# Altium PCB PCB1.PcbDoc
Units mm, origin at the board's own origin, x right, y up, seen from the top; angles counter-clockwise.
Board outline 200 x 56 mm, 2 copper layers (Top Layer, Bottom Layer); 54 components, 45 nets, 164 pads, 1 vias.
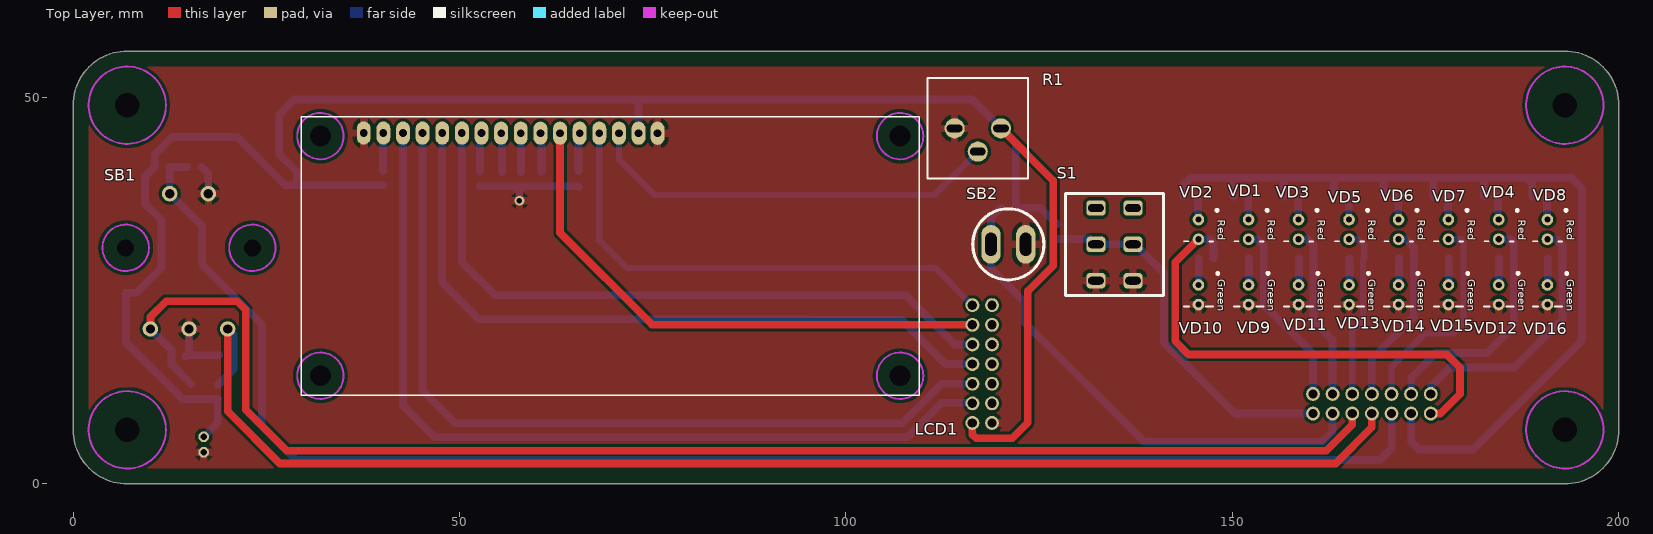
[diagram p0: Top Layer view]
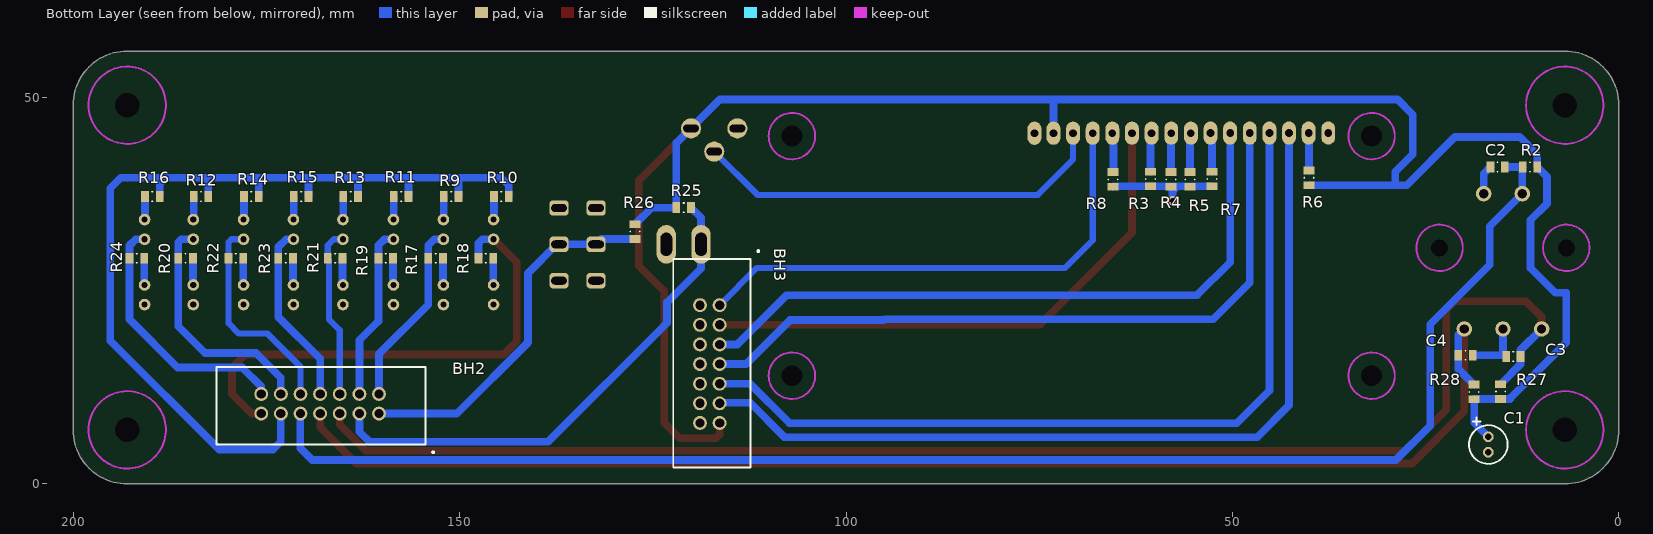
[diagram p1: Bottom Layer view, seen from below]
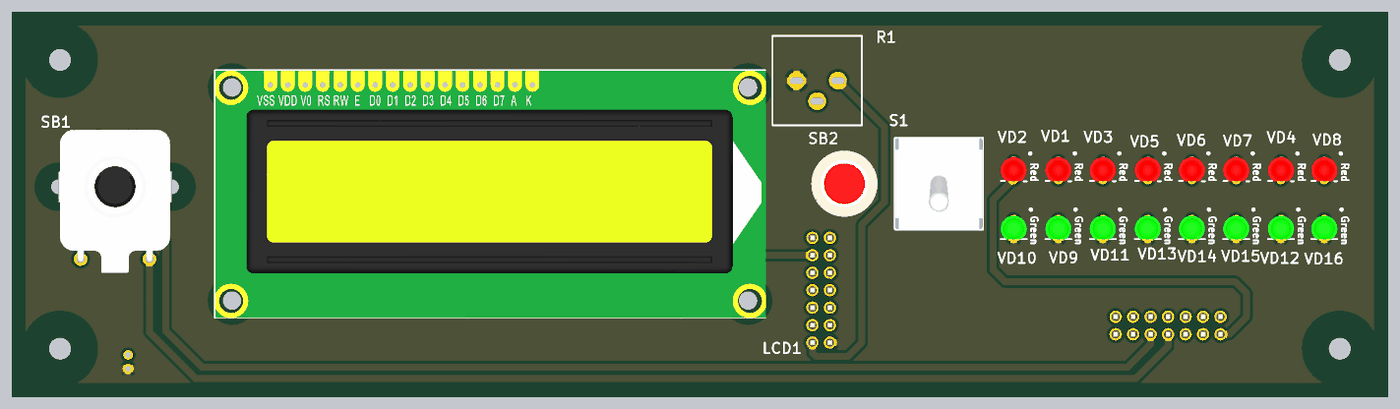
[diagram p2: 3D render of the assembled board from above, using the file's embedded part models]
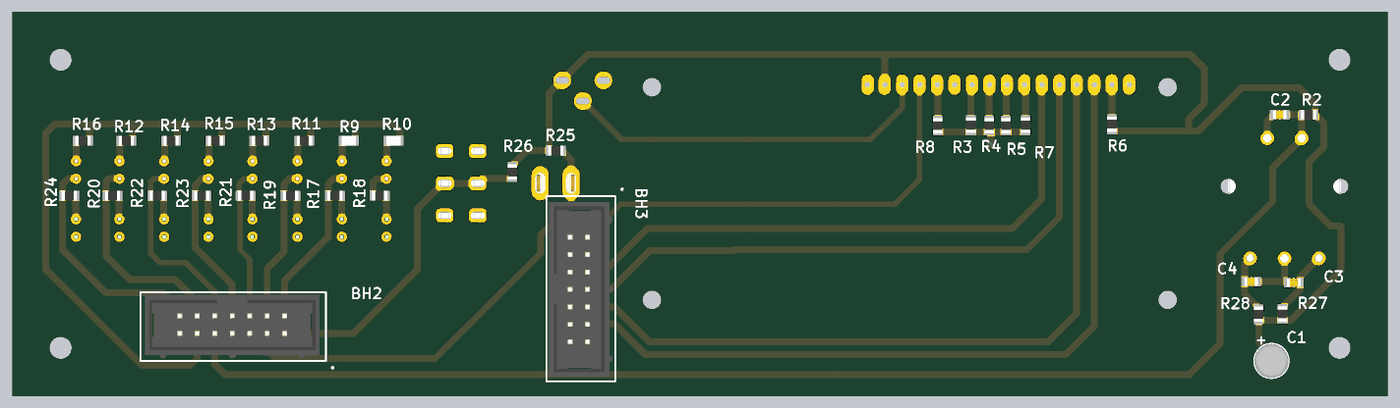
[diagram p3: 3D render of the assembled board from below, using the file's embedded part models]

## Layer stack, top to bottom
Top Solder: solder mask 0.0102, Solder Resist, Dk 3.5
Top Layer: signal copper 0.0356
Dielectric 1: dielectric 0.32, FR-4, Dk 4.8
Bottom Layer: signal copper 0.0356
Bottom Solder: solder mask 0.0102, Solder Resist, Dk 3.5

## Board outline
0,7 0,49 cw(c7,49) 7,56 193,56 cw(c193,49) 200,49 200,7 cw(c193,7) 193,0 7,0 cw(c7,7)

## Design rules (kind name [scope] priority, off if disabled: settings)
BoardOutlineClearance [All] p1: gap=2 ignorepadtopadclearanceinfootprint=FALSE
Clearance Clearance_1 [All] p1: gap=0.4 ignorepadtopadclearanceinfootprint=FALSE
Clearance [All vs InPolygon] p2: gap=0.5 ignorepadtopadclearanceinfootprint=FALSE
Height [All] p1: minheight=0 maxheight=100 prefheight=12.7
PlaneConnect [All] p1: planeconnectstyle=Relief reliefexpansion=0.508 reliefentries=4 reliefconductorwidth=1 reliefairgap=0.5
PolygonConnect [All] p1: connectstyle=Relief reliefconductorwidth=1 reliefentries=4 polygonreliefangle="90 Angle" airgapwidth=0.5
RoomDefinition U_СВЕТОДИОДЫ8 [InComponentClass('U_СВЕТОДИОДЫ8')] p1: confinementstyle=ConfineIn formatcopy=TRUE lockcomponents=FALSE outline 187.771,35.971 187.771,38.429 191.729,38.429 191.729,35.972 194.758,35.972 194.758,21.317 188.482,21.317 188.482,35.971
RoomDefinition U_СВЕТОДИОДЫ7 [InComponentClass('U_СВЕТОДИОДЫ7')] p2: confinementstyle=ConfineIn formatcopy=TRUE lockcomponents=FALSE outline 181.471,35.971 181.471,38.429 185.429,38.429 185.429,35.972 188.458,35.972 188.458,21.317 182.182,21.317 182.182,35.971
RoomDefinition U_СВЕТОДИОДЫ5 [InComponentClass('U_СВЕТОДИОДЫ5')] p3: confinementstyle=ConfineIn formatcopy=TRUE lockcomponents=FALSE outline 168.513,35.971 168.513,38.429 172.471,38.429 172.471,35.972 175.5,35.972 175.5,21.317 169.224,21.317 169.224,35.971
RoomDefinition U_СВЕТОДИОДЫ4 [InComponentClass('U_СВЕТОДИОДЫ4')] p4: confinementstyle=ConfineIn formatcopy=TRUE lockcomponents=FALSE outline 162.113,35.971 162.113,38.429 166.071,38.429 166.071,35.972 169.1,35.972 169.1,21.317 162.824,21.317 162.824,35.971
RoomDefinition U_СВЕТОДИОДЫ3 [InComponentClass('U_СВЕТОДИОДЫ3')] p5: confinementstyle=ConfineIn formatcopy=TRUE lockcomponents=FALSE outline 155.571,35.971 155.571,38.429 159.529,38.429 159.529,35.972 162.558,35.972 162.558,21.317 156.282,21.317 156.282,35.971
RoomDefinition U_СВЕТОДИОДЫ2 [InComponentClass('U_СВЕТОДИОДЫ2')] p6: confinementstyle=ConfineIn formatcopy=TRUE lockcomponents=FALSE outline 149.113,35.971 149.113,38.429 153.071,38.429 153.071,35.972 156.1,35.972 156.1,21.317 149.824,21.317 149.824,35.971
RoomDefinition U_СВЕТОДИОДЫ1 [InComponentClass('U_СВЕТОДИОДЫ1')] p7: confinementstyle=ConfineIn formatcopy=TRUE lockcomponents=FALSE outline 142.621,35.971 142.621,38.429 146.579,38.429 146.579,35.972 149.608,35.972 149.608,21.317 143.332,21.317 143.332,35.971
RoomDefinition U_СВЕТОДИОДЫ6 [InComponentClass('U_СВЕТОДИОДЫ6')] p8: confinementstyle=ConfineIn formatcopy=TRUE lockcomponents=FALSE outline 174.963,35.971 174.963,38.429 178.921,38.429 178.921,35.972 181.95,35.972 181.95,21.317 175.674,21.317 175.674,35.971
RoutingVias [All] p1: holewidth=0.711 width=1.27 viastyle="Through Hole" minholewidth=0.711 minwidth=1.27 maxholewidth=0.711 maxwidth=1.27
SolderMaskExpansion [All] p1: expansion=0.102
Width Width_2 [InNet('+3.3')] p1: maxlimit=1 minlimit=0.8 preferedwidth=1
Width Width_1 [InNet('GND')] p2: maxlimit=1 minlimit=0.8 preferedwidth=1
Width [All] p3: maxlimit=1 minlimit=0.1 preferedwidth=1
28 further rules are at their usual default settings.

## Classes and differential pairs
channel class СВЕТОДИОДЫ: U_СВЕТОДИОДЫ1 U_СВЕТОДИОДЫ2 U_СВЕТОДИОДЫ3 U_СВЕТОДИОДЫ4 U_СВЕТОДИОДЫ5 U_СВЕТОДИОДЫ6 U_СВЕТОДИОДЫ7 U_СВЕТОДИОДЫ8
component class управление+отладка: BH2 BH3 C1 C2 C3 C4 LCD1 R1 R2 R3 R4 R5 R6 R7 R8 R25 R26 R27 R28 S1 SB1 SB2
component class U_СВЕТОДИОДЫ1: R10 R18 R?7 VD2 VD10
component class U_СВЕТОДИОДЫ2: R9 R17 R?7 VD1 VD9
component class U_СВЕТОДИОДЫ3: R11 R19 R?7 VD3 VD11
component class U_СВЕТОДИОДЫ4: R13 R21 R?7 VD5 VD13
component class U_СВЕТОДИОДЫ5: R15 R23 R?7 VD6 VD14
component class U_СВЕТОДИОДЫ6: R14 R22 R?7 VD7 VD15
component class U_СВЕТОДИОДЫ7: R12 R20 R?7 VD4 VD12
component class U_СВЕТОДИОДЫ8: R1_U_СВЕТОДИОДЫ8 R2_U_СВЕТОДИОДЫ8 R16 R24 R?7 VD1_U_СВЕТОДИОДЫ8 VD2_U_СВЕТОДИОДЫ8 VD8 VD16

## Components (designator, comment, footprint, x,y, rotation, side; value= is the part's Value field where it differs from the comment)
BH2 "BH14(2)" "BH-14 (DS1013-14S) (IDC-14MS)" 160.42,9.1 r0 bottom
BH3 "BH14(3)" "BH-14 (DS1013-14S) (IDC-14MS)" 116.35,23.127 r270 bottom
C1 "C(AlEL)" C(AlEL) 16.9,4.1 r90 bottom
C2 "C(ceramic)" C(ceramic) 15.7,41 r180 bottom
C3 "C(ceramic)" C(ceramic) 13.65,16.5 r180 bottom
C4 "C(ceramic)" C(ceramic) 19.85,16.65 r0 bottom
LCD1 "BCB1602" BCB1602 32,14 r0 top
R1 "Comment" R(подстр) 117.05,46 r180 top (schematic designator R3)
R2 "R" R 11.5,41 r180 bottom (schematic designator R11)
R3 "R" R 60.6,39.45 r270 bottom (schematic designator R5)
R4 "R" R 57.95,39.4 r270 bottom (schematic designator R6)
R5 "R" R 55.5,39.4 r270 bottom (schematic designator R7)
R6 "R" R 40.1,39.6 r270 bottom (schematic designator R9)
R7 "R" R 52.65,39.45 r270 bottom (schematic designator R8)
R8 "R" R 65.45,39.4 r270 bottom (schematic designator R4)
R9 "R" R 151.092,37.2 r180 bottom (schematic designator R1)
R10 "R" R 144.6,37.2 r180 bottom (schematic designator R1)
R11 "R" R 157.55,37.2 r180 bottom (schematic designator R1)
R12 "R" R 183.45,37.2 r180 bottom (schematic designator R1)
R13 "R" R 164.092,37.2 r180 bottom (schematic designator R1)
R14 "R" R 176.942,37.2 r180 bottom (schematic designator R1)
R15 "R" R 170.492,37.2 r180 bottom (schematic designator R1)
R16 "R" R 189.75,37.2 r180 bottom (schematic designator R1)
R17 "R" R 153.092,29.2 r0 bottom (schematic designator R2)
R18 "R" R 146.6,29.2 r0 bottom (schematic designator R2)
R19 "R" R 159.55,29.2 r0 bottom (schematic designator R2)
R20 "R" R 185.45,29.2 r0 bottom (schematic designator R2)
R21 "R" R 166.092,29.2 r0 bottom (schematic designator R2)
R22 "R" R 178.942,29.2 r0 bottom (schematic designator R2)
R23 "R" R 172.492,29.2 r0 bottom (schematic designator R2)
R24 "R" R 191.75,29.2 r0 bottom (schematic designator R2)
R25 "R" R 121,35.75 r180 bottom (schematic designator R12)
R26 "R" R 127.3,32.65 r270 bottom (schematic designator R10)
R27 "R" R 15.3,11.95 r270 bottom (schematic designator R13)
R28 "R" R 18.75,11.9 r270 bottom (schematic designator R14)
S1 "(?)тумблер" MTS-2 134.735,31 r180 top
SB1 "PEC16-4220F-S0024" PEC16-4220F-S0024 15,30.55 r0 top (schematic designator SB2)
SB2 "ПУСК" кнопка 121,31 r270 top (schematic designator SB1)
VD1 "L-934(RED)" L-934(RED) 152.092,34.2 r270 top
VD2 "L-934(RED)" L-934(RED) 145.6,34.2 r270 top (schematic designator VD1)
VD3 "L-934(RED)" L-934(RED) 158.55,34.2 r270 top (schematic designator VD1)
VD4 "L-934(RED)" L-934(RED) 184.45,34.2 r270 top (schematic designator VD1)
VD5 "L-934(RED)" L-934(RED) 165.092,34.2 r270 top (schematic designator VD1)
VD6 "L-934(RED)" L-934(RED) 171.492,34.2 r270 top (schematic designator VD1)
VD7 "L-934(RED)" L-934(RED) 177.942,34.2 r270 top (schematic designator VD1)
VD8 "L-934(RED)" L-934(RED) 190.75,34.2 r270 top (schematic designator VD1)
VD9 "L-934(GREEN)" L-934(GREEN) 152.092,25.74 r270 top (schematic designator VD2)
VD10 "L-934(GREEN)" L-934(GREEN) 145.6,25.74 r270 top (schematic designator VD2)
VD11 "L-934(GREEN)" L-934(GREEN) 158.55,25.74 r270 top (schematic designator VD2)
VD12 "L-934(GREEN)" L-934(GREEN) 184.45,25.74 r270 top (schematic designator VD2)
VD13 "L-934(GREEN)" L-934(GREEN) 165.092,25.74 r270 top (schematic designator VD2)
VD14 "L-934(GREEN)" L-934(GREEN) 171.492,25.74 r270 top (schematic designator VD2)
VD15 "L-934(GREEN)" L-934(GREEN) 177.942,25.74 r270 top (schematic designator VD2)
VD16 "L-934(GREEN)" L-934(GREEN) 190.75,25.74 r270 top (schematic designator VD2)

## Footprints (in the part's own frame and the unit in brackets; to place one, negate y for a bottom-side part, rotate by r counter-clockwise, add the part's x,y. Pads: shape width x height; smd on the part's side, far side on the other; paste and mask are expansions set on the pad)
BCB1602 [mm]
  oval 1.8x3 hole 1: 1(43.62,31.376) 2(41.16,31.377) 3(38.62,31.379) 4(36.08,31.381) 5(33.54,31.382) 6(31,31.384) 7(28.46,31.385) 8(25.92,31.387) 9(23.38,31.389) 10(20.84,31.39) 11(18.3,31.392) 12(15.76,31.394) 13(13.22,31.395) 14(10.68,31.397) 15(8.14,31.398) 16(5.6,31.4)
  round 2.5 hole 2.7 unplated: *(0,0) *(0,31) *(75,0) *(75,31)
  silkscreen extent -2.5,-2.5 77.5,33.5, body extent -2.43,-2.55 77.57,33.45, height 17.05
"BH-14 (DS1013-14S) (IDC-14MS)" [mm]
  round 1.8 hole 1.2: 1(0,0) 2(2.54,0) 3(5.08,0) 4(7.62,0) 5(10.16,0) 6(12.7,0) 7(15.24,0) 8(0,-2.54) 9(2.54,-2.54) 10(5.08,-2.54) 11(7.62,-2.54) 12(10.16,-2.54) 13(12.7,-2.54) 14(15.24,-2.54)
  silkscreen extent -7.12,-6 21,5.12, body extent -5.1,-5.7 20.3,3.65, height 10.25
C(AlEL) [mm]
  round 1.4 hole 0.8: 1(2,0) 2(0,0)
  silkscreen extent -1.5,-2.5 4.5,2.5, body extent -1.5,-2.5 3.5,2.5, height 12
C(ceramic) [mm] "Chip Capacitor, 2-Leads, Body 2,00x1,25mm, IPC Medium Density"
  rect 1x1.4 smd: 1(-0.925,0) 2(0.925,0)
  silkscreen extent -0.05,-0.6 0.05,0.6, body extent -1,-0.63 1,0.62, height 1.3
L-934(GREEN) [mm]
  round 1.5 hole 0.8: 1(0,0) 2(2.54,0)
  silkscreen extent -1.64,-1.89 2.81,2.64, body extent -0.61,-1.9 2.81,1.9, height 5.64
L-934(RED) [mm]
  round 1.5 hole 0.8: 1(0,0) 2(2.54,0)
  silkscreen extent -1.34,-1.85 2.85,2.54, body extent -0.65,-1.9 2.85,1.9, height 6
MTS-2 [mm]
  rrect50% 2.5x2 hole 1 slot 2 at 0 deg: 1(-2.4,4.7) 1(2.4,4.7) 2(-2.4,0) 2(2.4,0) 3(-2.4,-4.7) 3(2.4,-4.7)
  silkscreen extent -6.35,-6.6 6.35,6.6, body extent -6.35,-6.6 6.35,6.6, height 29.34
PEC16-4220F-S0024 [mm]
  round 2 hole 1.2: 1(-5,-10.5) 2(0,-10.5) 3(5,-10.5) 4(2.5,7) 5(-2.5,7)
  round 2 hole 2.2 unplated: *(-8.2,0) *(8.2,0)
  body extent -8.25,-12.5 8.25,8.3, height 28.3
R [mm] "Chip Resistor, 2-Leads, Body 2,10x1,30mm, IPC Medium Density"
  rect 1x1.4 smd: 1(-0.95,0) 2(0.95,0)
  silkscreen extent -0.05,-0.6 0.05,0.6, body extent -1.1,-0.7 1.1,0.7, height 0.6
R(подстр) [mm]
  round 2.6 hole 1 slot 2 at 0 deg: 1(-3,0) 2(3,0) 3(0,3)
  silkscreen extent -6.5,-6.5 6.5,6.5, body extent -6.5,-6.3 6.3,6.5, height 6
кнопка [mm]
  oval 5x2.5 hole 1.5 slot 3 at 0 deg: 1(0,2.25) 2(0,-2.25)
  silkscreen extent -4.6,-4.6 4.6,4.6, body extent -4.75,-4.75 4.75,4.75, height 22.6

## Part data
R1: library part R(подстр)
SB2: library part кнопка

## Free pads (board coordinates)
  round 1.6 hole 3.2 unplated: 2(7,7) 2(7,49) 2(193,7) 2(193,49)

## Via types
v1: diameter 1.27, hole 0.711, Top Layer to Bottom Layer, tented both sides, 1 vias

## Nets (pads, with @x,y where several pads share a name; then routed paths per layer and width w, separated by ;. In a path a pad name is that pad's centre, name@x,y a point inside that pad or via, vN(x,y) a via of type N, cw(c..) or ccw(c..) an arc to the next point about the centre after c; other vN are vias at no path point)
+3.3: BH3.7 C1.1 LCD1.2 R1.1 R2.2 R6.2 R25.1 R26.1 R27.2 R28.2 | length 261.3
  Top Layer w1: BH3.7 116.35,6.4 116.85,5.9 121.5,5.9 123.5,7.9 123.5,24.95 126.8,28.25 126.8,39.25 R1.1
  Bottom Layer w1: C1.1 18.7,7.9 R28.2@18.7,11 ; R28.2 R28.2@18.7,11 ; 28.6,38.65 27.45,38.65 21.2,44.9 12.85,44.9 10.55,42.6 R2.2 9.3,39.75 9.3,36.25 11.45,34.1 11.45,27.95 8.25,24.75 6.8,24.75 6.8,18.3 14.1,11 R27.2 R28.2@18.7,11 ; R6.2 28.95,38.65 28.95,40.4 26.675,42.675 26.675,47.775 28.65,49.75 73.15,49.75 ; LCD1.2 73.16,49.74 73.15,49.75 ; R26.1 125.15,35.75 R25.1 121.95,44.1 R1.1 116.3,49.75 73.15,49.75
GND: BH3.14 C1.2 C2.1 C3.1 C4.1 LCD1.1 LCD1.16 R1.2 R3.2 R4.2 R5.2 R7.2 R8.2 S1.1 SB1.2 SB1.4 SB2.1 VD9.2 VD10.2 VD11.2 VD12.2 VD13.2 VD14.2 VD15.2 VD16.2 | length 26.7
  Bottom Layer w1: C3.1 C3.1@14.725,16.65 ; SB1.2 15,16.925 C3.1@14.725,16.65 ; C2.1 17.5,40.125 SB1.4 ; C4.1 C3.1@14.725,16.65 ; R7.2 57.15,38.5 ; v1(57.75,36.65) 57.75,37.9 57.15,38.5 ; R8.2 65.4,38.5 R3.2 57.15,38.5
NetBH2_1: BH2.1 R26.2 S1.2 | length 47.7
  Bottom Layer w1: R26.2 131.635,31.7 132.335,31 137.135,31 137.4,31 141.15,27.25 141.15,18.3 150.35,9.1 BH2.1
NetBH2_2: BH2.2 R25.2 SB2.2 | length 66.3
  Bottom Layer w1: R25.2 118.75,34.45 SB2.2 118.75,27.9 123.15,23.5 123.15,20.85 138.55,5.45 161.65,5.45 162.96,6.76 BH2.2
NetBH2_3: BH2.3 C3.2 R27.1 SB1.1 | length 185.7
  Top Layer w1: SB1.1 10,21.6 12.05,23.65 21.25,23.65 22.35,22.55 22.35,9.6 27.65,4.3 162.15,4.3 165.5,7.65 BH2.3
  Bottom Layer w1: SB1.1 12.725,17.325 C3.2 12.725,15.475 R27.1
NetBH2_4: BH2.4 C4.2 R28.1 SB1.3 | length 173.5
  Top Layer w1: SB1.3 20,9.4 26.75,2.65 163.35,2.65 168.04,7.34 BH2.4
  Bottom Layer w1: R28.1 20.775,14.875 C4.2 20.775,19.275 SB1.3
NetBH2_5: BH2.5 C2.2 R2.1 SB1.5 | length 193.9
  Bottom Layer w1: C2.2 R2.1 12.5,40.95 SB1.5 16.7,33.35 16.7,28.35 24.4,20.65 24.4,7.55 28.85,3.1 169.05,3.1 170.6,4.65 170.6,9.08 BH2.5
NetBH3_1: BH3.1 LCD1.4 | length 65.6
  Bottom Layer w0.8: LCD1.4 68.08,31.52 71.65,27.95 111.527,27.95 BH3.1
NetBH3_2: BH3.2 LCD1.6 | length 71.2
  Top Layer w1: LCD1.6 63,32.5 74.913,20.587 BH3.2
NetBH3_3: BH3.3 LCD1.11 | length 87.2
  Bottom Layer w1: LCD1.11 50.3,28.7 54.6,24.4 107.7,24.4 114.053,18.047 BH3.3
NetBH3_4: BH3.4 LCD1.12 | length 92.3
  Bottom Layer w1: LCD1.12 47.76,26.04 52.5,21.3 95,21.3 95.1,21.2 107.25,21.2 112.943,15.507 BH3.4
NetBH3_5: BH3.5 LCD1.13 | length 108.3
  Bottom Layer w1: LCD1.13 45.22,12.08 49.45,7.85 107.3,7.85 112.417,12.967 BH3.5
NetBH3_6: BH3.6 LCD1.14 | length 112.5
  Bottom Layer w1: LCD1.14 42.68,10.17 46.8,6.05 107.95,6.05 112.4,10.5 116.277,10.5 BH3.6
NetLCD1_3: LCD1.3 R1.3 | length 54.1
  Bottom Layer w0.8: LCD1.3@70.6,45.399 LCD1.3 70.62,41.98 75.2,37.4 111.45,37.4 R1.3
NetLCD1_5: LCD1.5 R8.1 | length 5
  Bottom Layer w0.5: LCD1.5@65.45,45.292 LCD1.5
  Bottom Layer w1: R8.1@65.4,40.5 LCD1.5@65.4,45.345
NetLCD1_7: LCD1.7 R3.1 | length 5
  Bottom Layer w1: LCD1.7 60.6,45.245 R3.1
NetLCD1_8: LCD1.8 R4.1 | length 5
  Bottom Layer w1: LCD1.8 57.95,45.357 R4.1
NetLCD1_9: LCD1.9 R5.1 | length 5.1
  Bottom Layer w1: LCD1.9 55.5,45.269 R5.1
NetLCD1_10: LCD1.10 R7.1 | length 5.1
  Bottom Layer w1: R7.1 52.65,45.2 LCD1.10
NetLCD1_15: LCD1.15 R6.1 | length 4.9
  Bottom Layer w1: R6.1 40.1,45.358 LCD1.15
NetR9_1: R9.1 VD1.1 | length 3
  Bottom Layer w1: R9.1 152.042,34.25 VD1.1
NetR10_1: R10.1 VD2.1 | length 3
  Bottom Layer w1: R10.1 145.55,34.25 VD2.1
NetR11_1: R11.1 VD3.1 | length 3
  Bottom Layer w1: R11.1 158.5,34.25 VD3.1
NetR12_1: R12.1 VD4.1 | length 3
  Bottom Layer w1: R12.1 184.4,34.25 VD4.1
NetR13_1: R13.1 VD5.1 | length 3
  Bottom Layer w1: R13.1 165.042,34.25 VD5.1
NetR14_1: R14.1 VD7.1 | length 3
  Bottom Layer w1: R14.1 177.892,34.25 VD7.1
NetR15_1: R15.1 VD6.1 | length 3
  Bottom Layer w1: R15.1 171.442,34.25 VD6.1
NetR16_1: R16.1 VD8.1 | length 3
  Bottom Layer w1: R16.1 190.7,34.25 VD8.1
NetR17_1: R17.1 VD9.1 | length 3.5
  Bottom Layer w1: VD9.1 152.142,25.79 R17.1
NetR18_1: R18.1 VD10.1 | length 3.5
  Bottom Layer w1: VD10.1 145.65,25.79 R18.1
NetR19_1: R19.1 VD11.1 | length 3.5
  Bottom Layer w1: VD11.1 158.6,25.79 R19.1
NetR20_1: R20.1 VD12.1 | length 3.5
  Bottom Layer w1: VD12.1 184.5,25.79 R20.1
NetR21_1: R21.1 VD13.1 | length 3.5
  Bottom Layer w1: VD13.1 165.142,25.79 R21.1
NetR22_1: R22.1 VD15.1 | length 3.5
  Bottom Layer w1: VD15.1 177.992,25.79 R22.1
NetR23_1: R23.1 VD14.1 | length 3.5
  Bottom Layer w1: VD14.1 171.542,25.79 R23.1
NetR24_1: R24.1 VD16.1 | length 3.5
  Bottom Layer w1: VD16.1 190.8,25.79 R24.1
ГБ1: BH2.7 R18.2 VD2.2 | length 65.1
  Top Layer w1: VD2.2 142.6,28.66 142.6,18.45 144.3,16.75 177.75,16.75 179.45,15.05 179.45,11.65 176.9,9.1 BH2.7
  Bottom Layer w1: VD2.2 145.61,31.65 147.05,31.65 147.55,31.15 R18.2
ГБ2: BH2.8 R17.2 VD1.2 | length 24.1
  Bottom Layer w1: VD1.2 153.252,31.66 154.042,30.87 R17.2 154.042,23.208 160.42,16.83 BH2.8
ГБ3: BH2.9 R19.2 VD3.2 | length 22.5
  Bottom Layer w1: VD3.2 159.71,31.66 160.5,30.87 R19.2 160.5,21.05 162.96,18.59 BH2.9
ГБ4: BH2.10 R21.2 VD5.2 | length 22.1
  Bottom Layer w0.8: VD5.2 166.252,31.66 167.042,30.87 R21.2 166.9,29.058 166.9,21.3 165.5,19.9 BH2.10
ГБ5: BH2.11 R23.2 VD6.2 | length 23.6
  Bottom Layer w1: BH2.11 168.04,16.19 173.442,21.592 R23.2 173.442,30.658 172.44,31.66 VD6.2
ГБ6: BH2.12 R22.2 VD7.2 | length 27.8
  Bottom Layer w0.8: BH2.12 170.58,15.18 174.85,19.45 178.55,19.45 179.892,20.792 R22.2 179.892,31.3 179.532,31.66 VD7.2
ГБ7: BH2.13 R20.2 VD4.2 | length 31.1
  Bottom Layer w1: BH2.13 173.12,13.72 176.35,16.95 182.95,16.95 186.4,20.4 R20.2 186.4,31.25 185.99,31.66 VD4.2
ГБ8: BH2.14 R24.2 VD8.2 | length 33.4
  Bottom Layer w1: BH2.14 175.66,12.61 178.1,15.05 186.45,15.05 192.7,21.3 R24.2 192.7,30.85 191.89,31.66 VD8.2
РИ: BH2.6 R9.2 R10.2 R11.2 R12.2 R13.2 R14.2 R15.2 R16.2 | length 123.1
  Bottom Layer w1: R10.2 143.65,38.65 144.6,39.6 149.95,39.6 ; R9.2 150.142,39.408 149.95,39.6 ; R11.2 156.6,39.6 ; R13.2 163.142,39.358 162.9,39.6 ; R15.2 169.542,39.442 169.7,39.6 ; BH2.6 173.12,5.48 174.15,4.45 181.1,4.45 195.2,18.55 195.2,38.25 193.85,39.6 188.05,39.6 ; R14.2 175.992,39.508 175.9,39.6 ; R12.2 182.5,39.4 182.3,39.6 ; R16.2 188.8,38.85 188.05,39.6 ; 149.95,39.6 156.6,39.6 ; 156.6,39.6 162.9,39.6 ; 162.9,39.6 169.7,39.6 ; 169.7,39.6 175.9,39.6 ; 175.9,39.6 182.3,39.6 ; 182.3,39.6 188.05,39.6
pads on no net: BH3.8 BH3.9 BH3.10 BH3.11 BH3.12 BH3.13 LCD1.* S1.3 SB1.*

## Polygon pours and split planes (outlines as drawn)
GND on Top Layer "NONET_L01_P-001" (solid, remove dead copper, pour order 2): 0,0 0,90.05 199.95,90.05 199.9,90 199.9,0

## Keep-outs
Keep-Out Layer:
  circle w0.25: c32,14 r3
  circle w0.25: c32,45 r3
  circle w0.25: c107,45 r3
  circle w0.25: c107,14 r3
  circle w0.25: c6.8,30.55 r3
  circle w0.25: c23.2,30.55 r3
  circle w0.25: c193,49 r5
  circle w0.25: c7,49 r5
  circle w0.25: c193,7 r5
  circle w0.25: c7,7 r5

## Text inside footprints (layer, text, board x,y; h text height)
VD1: Top Overlay "Red" at 154.592,34.2 h1 r270
VD2: Top Overlay "Red" at 148.1,34.2 h1 r270
VD3: Top Overlay "Red" at 161.05,34.2 h1 r270
VD4: Top Overlay "Red" at 186.95,34.2 h1 r270
VD5: Top Overlay "Red" at 167.592,34.2 h1 r270
VD6: Top Overlay "Red" at 173.992,34.2 h1 r270
VD7: Top Overlay "Red" at 180.442,34.2 h1 r270
VD8: Top Overlay "Red" at 193.25,34.2 h1 r270
VD9: Top Overlay "Green" at 154.592,26.49 h1 r270
VD10: Top Overlay "Green" at 148.1,26.49 h1 r270
VD11: Top Overlay "Green" at 161.05,26.49 h1 r270
VD12: Top Overlay "Green" at 186.95,26.49 h1 r270
VD13: Top Overlay "Green" at 167.592,26.49 h1 r270
VD14: Top Overlay "Green" at 173.992,26.49 h1 r270
VD15: Top Overlay "Green" at 180.442,26.49 h1 r270
VD16: Top Overlay "Green" at 193.25,26.49 h1 r270